# Altium PCB Boost_Conv_V1.0PCB.PcbDoc (part 1 of 3)
Units mm, origin at the board's own origin, x right, y up, seen from the top; angles counter-clockwise.
Board outline 213.5 x 150 mm, 2 copper layers (Top Layer, Bottom Layer); 53 components, 42 nets, 190 pads, 3434 vias.
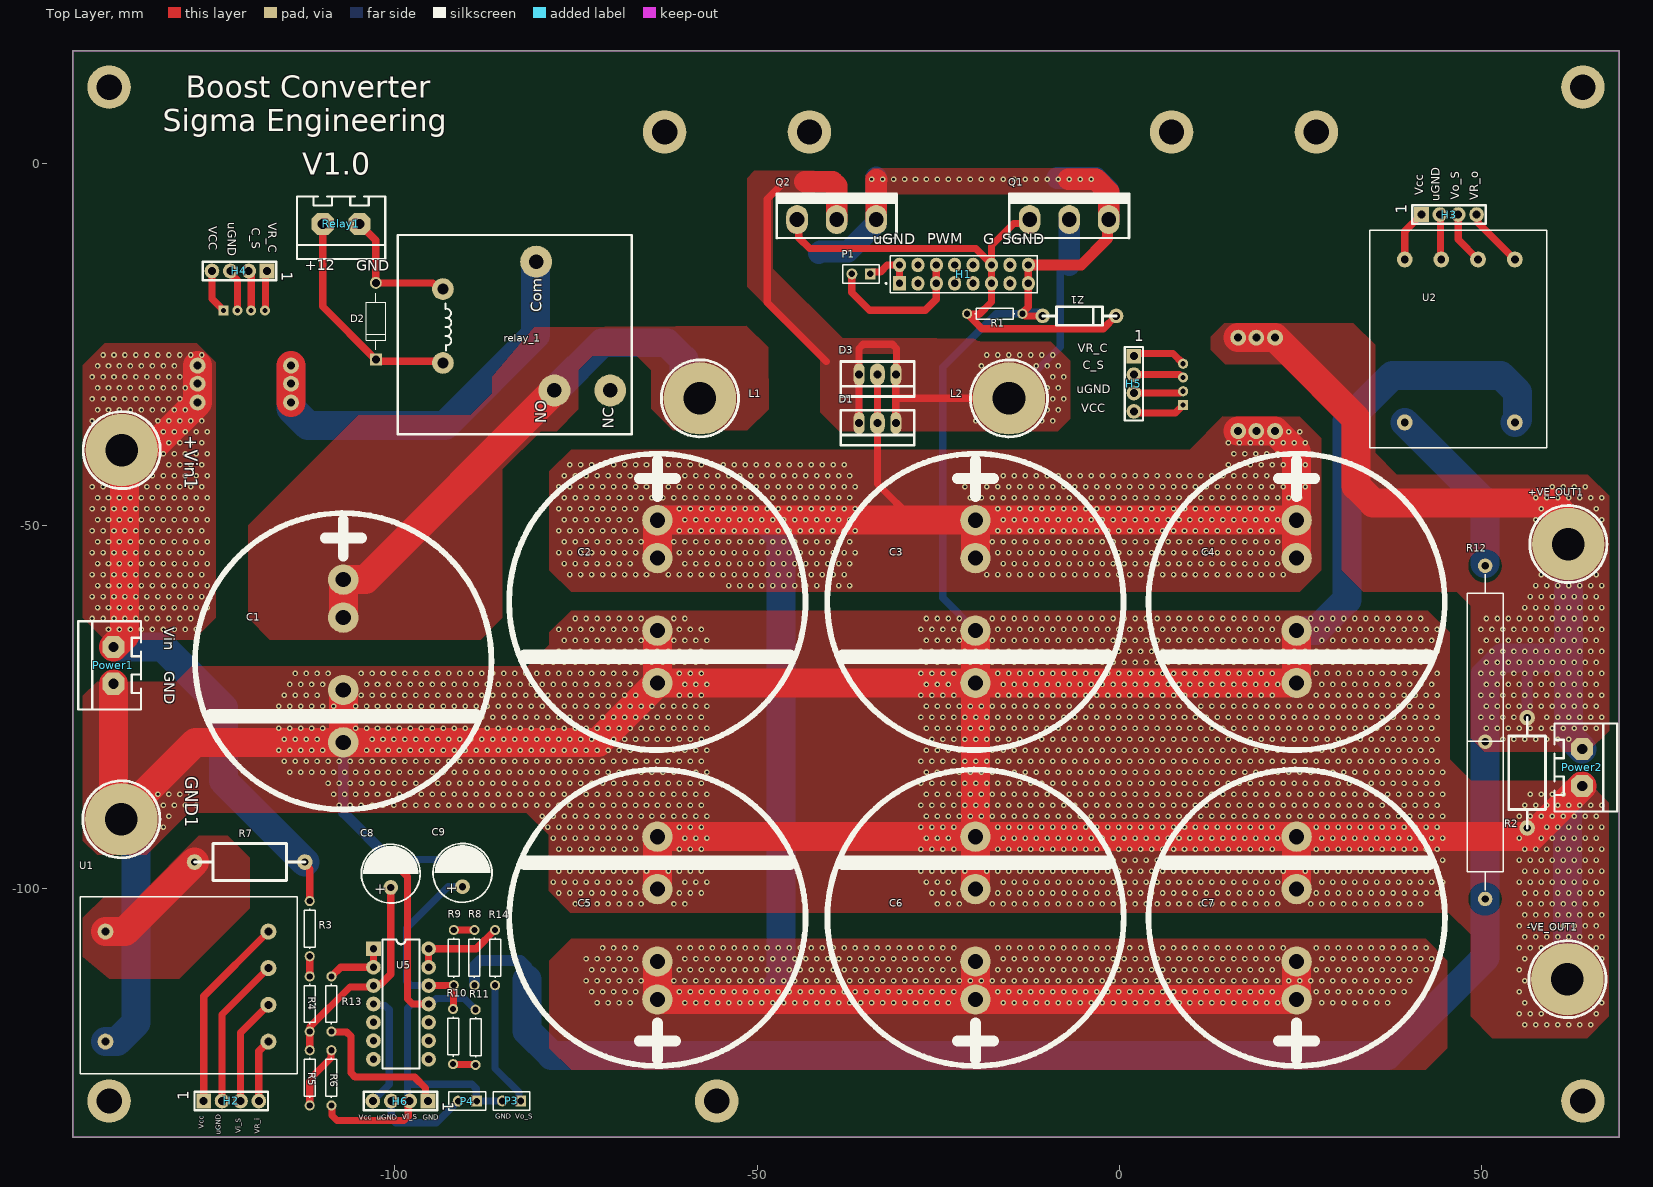
[diagram p0: Top Layer view]
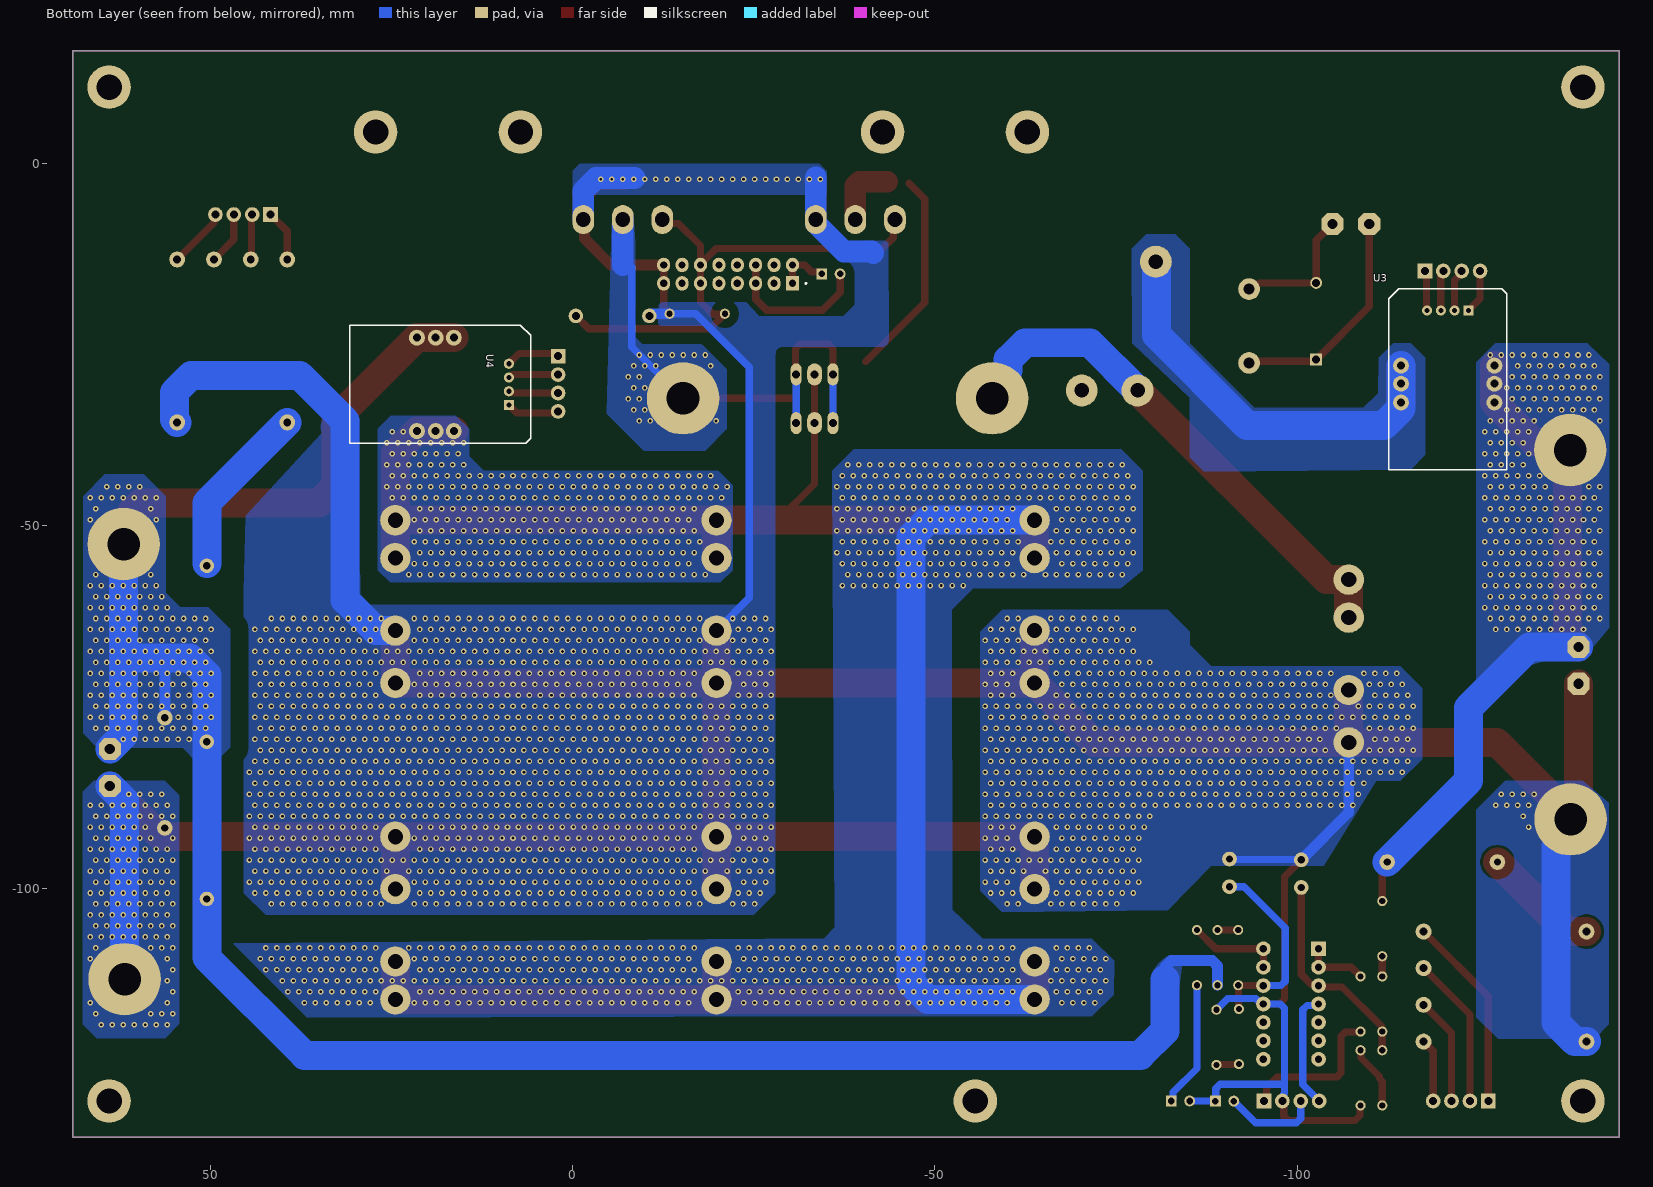
[diagram p1: Bottom Layer view, seen from below]

## Layer stack, top to bottom
Top Solder: solder mask 0.0102, Solder Resist, Dk 3.5
Top Layer: signal copper 0.0356
Dielectric 1: dielectric 0.32, FR-4, Dk 4.8
Bottom Layer: signal copper 0.0356
Bottom Solder: solder mask 0.0102, Solder Resist, Dk 3.5

## Board outline
-144.474,-134.403 69.026,-134.403 69.026,15.597 -144.474,15.597

## Design rules (kind name [scope] priority, off if disabled: settings)
Clearance [All] p1: gap=0.254 ignorepadtopadclearanceinfootprint=FALSE except(0: Arc-Hole Track-Hole SMDPad-Hole THPad-Hole Via-Hole Fill-Hole Poly-Hole Region-Hole Text-Hole; 0.08: Via-Via; 1.27: Track-Poly THPad-Poly; 2.54: Poly-Poly)
HoleSize [All] p1: absolutevalues=TRUE maxlimit=7 minlimit=0.025 maxpercent=80.000 minpercent=20.000
HoleToHoleClearance [All] p1: gap=0.1 allowstackedmicrovias=TRUE
MinimumSolderMaskSliver [All] p1: minsoldermaskwidth=0.01
PolygonConnect [All] p1: connectstyle=Direct reliefconductorwidth=0.254 reliefentries=4 polygonreliefangle="90 Angle" airgapwidth=0.254
RoutingVias [All] p1: holewidth=0.711 width=1.27 viastyle="Through Hole" minholewidth=0.1 minwidth=0.2 maxholewidth=3 maxwidth=6
SilkToSilkClearance [All] p1: silktosilkclearance=0
SilkToSolderMaskClearance [IsPad] p1: minsilkscreentomaskgap=0 clearancetoexposedcopper=TRUE
SolderMaskExpansion [All] p1: expansion=0.102 istentingtop=FALSE
Width [All] p1: maxlimit=5 minlimit=1 preferedwidth=4
25 further rules are at their usual default settings.

## Classes and differential pairs
component class Boost_Conv_V1.0_Sensing_Sch: C8 C9 H2 H3 H4 H5 H6 P3 P4 R3 R4 R5 R6 R7 R8 R9 R10 R11 R12 R13 R14 U1 U2 U3 U4 U5
component class Boost_Conv_V1.0_Power_Sch: +VE_OUT1 +Vin1 -VE_OUT1 C1 C2 C3 C4 C5 C6 C7 D1 D2 D3 GND1 L1 L2 Power1 Power2 Q2 R1 R2 Relay1 relay_1 Z1
component class Boost_Conv_V1.0_Control_Sch: H1 P1

## Components (designator, comment, footprint, x,y, rotation, side; value= is the part's Value field where it differs from the comment)
+VE_OUT1 "CON1" WIRE6MM 62.012,-52.503 r90 top
+Vin1 "CON1" WIRE6MM -137.725,-39.534 r90 top
-VE_OUT1 "CON1" WIRE6MM 61.885,-112.578 r90 top
C1 "Cap" ?#1 -107.136,-72.648 r90 top value="820 uF / 450 V"
C2 "Cap" ?#1 -63.766,-64.444 r90 top value="820 uF / 450 V"
C3 "Cap" ?#1 -19.849,-64.444 r90 top value="820 uF / 450 V"
C4 "Cap" ?#1 24.499,-64.444 r90 top value="820 uF / 450 V"
C5 "Cap" ?#1 -63.766,-100.14 r270 top value="820 uF / 450 V"
C6 "Cap" ?#1 -19.849,-100.14 r270 top value="820 uF / 450 V"
C7 "Cap" ?#1 24.499,-100.14 r270 top value="820 uF / 450 V"
C8 "CAP-DC" CAP-1.5 -100.574,-99.913 r90 top
C9 "CAP-DC" CAP-1.5 -90.674,-99.803 r90 top
D1 "Diode" TO220 -30.844,-35.8 r180 top value=FEP16
D2 "Diode" DIOAD1060W80L520D270 -102.647,-21.741 r90 top value=1N4007RL
D3 "Diode" TO220 -30.844,-29.069 r180 top value=FEP16
GND1 "CON1" WIRE6MM -137.774,-90.503 r90 top
H1 "H2*8" ?#2 -30.334,-16.503 r0 top
H2 "pin header 4p" SIP4 -126.414,-129.4 r0 top
H3 "pin header 4p" SIP4 41.726,-7.003 r0 top
H4 "pin header 4p" SIP4 -117.658,-14.795 r180 top
H5 "pin header 4p" SIP4 2.026,-26.563 r270 top
H6 "pin header 4p" SIP4 -95.434,-129.403 r180 top
L1 "CON1" WIRE6MM -57.895,-32.38 r0 top
L2 "CON1" WIRE6MM -15.223,-32.38 r0 top
P1 "Header 2" HDR1X2 -34.374,-15.203 r180 top
P3 "Header 2" HDR1X2 -82.634,-129.4 r180 top
P4 "Header 2" HDR1X2 -88.734,-129.403 r180 top
Power1 "Plugable_2Pin" TB2 -138.886,-71.792 r90 top
Power2 "Plugable_2Pin" TB2 63.926,-80.803 r270 top
Q1 "IGBT" TO247 -12.37,-7.698 r0 top value=IRGP4066
Q2 "IGBT" TO247 -44.475,-7.698 r0 top value=IRGP4066
R1 "Res1" AXIAL-0.3 -17.184,-20.703 r180 top value=2.2K
R2 "Res" R600 56.326,-91.703 r90 top value=10k/0.5w
R3 "Res1" AXIAL-0.3 -111.774,-105.603 r90 top value=200K
R4 "Res1" AXIAL-0.3 -111.774,-116.003 r90 top value=50K
R5 "Res1" AXIAL-0.3 -111.774,-126.203 r90 top value=20K
R6 "Res1" AXIAL-0.3 -108.774,-126.203 r90 top value=10K
R7 "2.5K / 0.25W" R600 -127.674,-96.403 r0 top
R8 "Res1" AXIAL-0.3 -89.024,-109.603 r270 top value=500K
R9 "Res1" AXIAL-0.3 -91.874,-109.603 r90 top value=100K
R10 "Res1" AXIAL-0.3 -91.974,-120.503 r90 top value=20K
R11 "Res1" AXIAL-0.3 -88.874,-120.603 r270 top value=10K
R12 "6K / 1W" R-VSENSE 50.526,-55.503 r270 top
R13 "Res1" AXIAL-0.3 -108.774,-116.003 r90 top value=0
R14 "Res1" AXIAL-0.3 -86.174,-109.603 r90 top value=0
Relay1 "Plugable_2Pin" TB2 -104.894,-8.303 r180 top
relay_1 "PreChgRelay" NT90TNCS12CB -67.306,-8.345 r180 top value=NT90THLCE12CB
U1 "VS" VSENSE -117.474,-121.203 r180 top
U2 "VS" VSENSE 54.626,-13.203 r270 top
U3 "JCT-TSRNP" JCT-TSRNP -123.656,-20.256 r270 bottom
U4 "JCT-TSRNP" JCT-TSRNP 8.826,-33.303 r0 bottom
U5 "MCP6004" DIP14 -102.974,-108.383 r0 top
Z1 "18 V / 0.5 W" D3 -0.414,-21.003 r0 top

## Footprints (in the part's own frame and the unit in brackets; to place one, negate y for a bottom-side part, rotate by r counter-clockwise, add the part's x,y. Pads: shape width x height; smd on the part's side, far side on the other; paste and mask are expansions set on the pad)
AXIAL-0.3 [mm] "Axial Device, Thru-Hole; 2 Leads; 0.3 in Pin Spacing"
  round 1.4 hole 0.85: 1(-3.81,0) 2(3.81,0)
  silkscreen extent -2.77,-0.76 2.77,0.76
CAP-1.5 [mil]
  round 80 hole 39.37: 1(0,0) 2(150,0)
  silkscreen extent -85,-160 235,160, body extent -93,-167 241,167, height 512
D3 [mil]
  round 79 hole 43.31: A(-400,0) K(0,0)
  silkscreen extent -400,-50 0,50, body extent -416,-50 16,56, height 189
DIOAD1060W80L520D270 [mm]
  round 1.65 hole 1.1: A(5.3,0)
  rect 1.65x1.65 hole 1.1: C(-5.3,0)
  silkscreen extent -3.9,-1.35 3.9,1.35, body extent -5.69,-1.36 5.69,1.36, height 2.72
DIP14 [mil]
  rect 80x80 hole 40: 1(0,0)
  round 80 hole 40: 2(0,-100) 3(0,-200) 4(0,-300) 5(0,-400) 6(0,-500) 7(0,-600) 8(300,-600) 9(300,-500) 10(300,-400) 11(300,-300) 12(300,-200) 13(300,-100) 14(300,0)
  silkscreen extent 50,-650 250,50
HDR1X2 [mm] "Connector; Header; 2 Position"
  rect 1.5x1.5 hole 0.9: 1(0,0)
  round 1.5 hole 0.9: 2(2.54,0)
  silkscreen extent -1.27,-1.27 3.81,1.27
JCT-TSRNP [mm]
  round 1.4 hole 0.7: GND(0,-1.9) OUT(0,-3.8) VR(0,-5.7)
  round 2.2 hole 1.1: IP+(7.6,3.6) IP+(10.1,3.6) IP+(12.7,3.6) IP-(7.6,-9.3) IP-(10.1,-9.3) IP-(12.7,-9.3)
  rect 1.4x1.4 hole 0.7: VCC(0,0)
  silkscreen extent -3,-11 22,5.3
NT90TNCS12CB [mm]
  round 3 hole 1.5: +(26.07,19.151) -(26.07,8.951)
  round 4.4 hole 2: COM(13.21,5.151) NC(2.97,22.951) NO(10.67,22.951)
  silkscreen extent 0,1.49 32.3,29
R600 [mil]
  round 85 hole 40: 1(0,0) 2(600,0)
  silkscreen extent 0,-100 600,100, body extent -41,-98 641,98, height 280
R-VSENSE [mm]
  round 2 hole 1: 1(0,0) 2(46,0)
  silkscreen extent 1.2,-2.5 44.8,2.5
SIP4 [mil]
  rect 80x80 hole 43.31: 1(0,0)
  round 80 hole 43.31: 2(100,0) 3(200,0) 4(300,0)
  silkscreen extent -50,-50 350,50, body extent -50,-45 350,55, height 334
TB2 [mil]
  oct 120x120 hole 55.12: 1(0,0) 2(200,0)
  silkscreen extent -139,-150 339,191
TO220 [mm]
  oval 1.5x3.048 hole 1.1: 1(0,0) 3(5.08,0)
  oval 2.032x3.048 hole 1.1: 2(2.54,0)
  silkscreen extent -2.54,-1.78 7.62,3.05, body extent -2.78,-1.7 7.87,3.1, height 16.96
TO247 [mm]
  oval 3x4 hole 2.032: 1(0,0) 2(5.461,0) 3(10.922,0)
  silkscreen extent -2.95,-2.69 13.87,3.71, body extent -2.46,-2.37 13.39,2.93, height 24.95
VSENSE [mm]
  round 2.2 hole 1.1: +(22.5,-15.2) -(22.5,0) uGND(0,-10.16) Vcc(0,-15.2) Vo(0,-5.08) VR(0,0)
  silkscreen extent -4,-20 26,4.4
WIRE6MM [mm]
  round 10 hole 4.5: 1(0,0)
  silkscreen extent -5.32,-5.32 5.32,5.31
?#1 [mm]
  round 4.2 hole 2.1: 1(10,0) 1(15.24,0) 2(-7.239,0) 2(0,0)
  silkscreen extent -16.5,-20.45 24.42,20.46, body extent -16.9,-20.9 24.9,20.9, height 40
?#2 [mm] "Connector; Header; 4x2 Position"
  rect 1.8x2 hole 1: 1(0,0)
  oval 1.8x2 hole 1: 1(0,2.54) 2(2.54,0) 2(2.54,2.54) 3(5.08,0) 3(5.08,2.54) 4(7.62,0) 4(7.62,2.54) 5(10.16,0) 5(10.16,2.54) 6(12.7,0) 6(12.7,2.54) 7(15.24,0) 7(15.24,2.54) 8(17.78,0) 8(17.78,2.54)
  silkscreen extent -1.95,-1.27 19.08,3.81, body extent -1.24,-1.27 19.08,3.73, height 8.6

## Part data
+VE_OUT1 +Vin1 -VE_OUT1 GND1 L1 L2: "Connector", SMD/TH=TH
C1 C2 C3 C4 C5 C6 C7: library part "CAPACITOR POL", "Electrolytic Capacitors", DPM/VM/AM="DPM, VM, AM", SMD/TH=TH
D1 D3 Q1 Q2: library part IRF540N, "N-Channel MOSFET", LatestRevisionDate=17-Jul-2002, LatestRevisionNote="Re-released for DXP Platform.", PackageDescription="TO, Flat Index; 3 In-Line, Axial Leads; Body Dia. 4.6mm; Lead Dia. 0.5 mm (max)", PackageReference=E3, PackageVersion=1995/1996, Published=8-Jun-2000, Publisher="Altium Limited"
D2: library part 1N4007RL, "Diode Standard 1000 V 1A Through Hole Axial", Package="DO-41-2 ON Semiconductor", Availability="In Stock", Check_prices=https://www.snapeda.com/parts/1N4007RL/Onsemi/view-part/?ref=eda, MF="ON Semiconductor", MP=1N4007RL, Price=None, Purchase-URL=https://pricing.snapeda.com/search/part/1N4007RL/?ref=eda, SnapEDA_Link=https://www.snapeda.com/parts/1N4007RL/Onsemi/view-part/?ref=snap
H1: library part "Header 8X2"
H2 H3 H4 H5 H6: Manufacturer="TE Connectivity AMP", Manufacturer Part Number=2355186-4, Supplier Part Number 1=17-2355186-4-ND, Pricing 1="1=0.84, 10=0.708, 100=0.6356, 500=0.52, 1000=0.46222, 5000=0.40444, 10000=0.38518 (USD)", Stock 1=5950, Supplier 1=Digi-Key
P1 P3 P4: "Header, 2-Pin", LatestRevisionDate=17-Jul-2002, LatestRevisionNote="Re-released for DXP Platform.", Publisher="Altium Limited"
Power1 Power2 Relay1: library part CON2, "Connector", SMD/TH=TH
R1 R3 R4 R5 R6 R8 R9 R10 R11 R13 R14: "Resistor", LatestRevisionDate=17-Jul-2002, LatestRevisionNote="Re-released for DXP Platform.", PackageDescription="Axial Device, Thru-Hole; 2 Leads; 0.3 in Pin Spacing", PackageReference=AXIAL-0.3, Published=8-Jun-2000, Publisher="Altium Limited"
R2 R7: library part Res1, "Resistor", SMD/TH=SMD
R12: library part R-VSENSE
relay_1: "NT90THLCE12CB"
U1 U2: library part Vsense-JCT-L25P3.3, "JCT-L25P3.3-voltage sensor"
U5: "Low Power Quad Operational Amplifier", note=SC, SMD/TH=SMD
Z1: library part Zener_Diode, "Zener diode", SMD/TH=SMD

## Free pads (board coordinates)
  round 6 hole 3.5: 2(-139.474,-129.4) 2(-139.474,10.597) 2(-62.774,4.393) 2(-55.574,-129.4) 2(-42.774,4.397) 2(7.229,4.393) 2(27.229,4.393) 2(64.026,-129.4) 2(64.026,10.597)

## Via types
v1: diameter 0.762, hole 0.381, Top Layer to Bottom Layer, 3433 vias
v2: diameter 2, hole 1, Top Layer to Bottom Layer, 1 vias

## Nets (pads, with @x,y where several pads share a name; then routed paths per layer and width w, separated by ;. In a path a pad name is that pad's centre, name@x,y a point inside that pad or via, vN(x,y) a via of type N, cw(c..) or ccw(c..) an arc to the next point about the centre after c; other vN are vias at no path point)
C_Sense_in: H4.2 U3.OUT | length 5.6
  Top Layer w1: H4.2@-120.198,-14.795 -120.198,-15.075 -119.856,-15.417 U3.OUT@-119.856,-20.256
C_Sense_out: H5.2 U4.OUT | length 7
  Top Layer w1: H5.2@2.026,-29.103 8.318,-29.103 8.718,-29.503 U4.OUT@8.826,-29.503
Cathode: C2.1 C3.1 C4.1 C5.1 C6.1 C7.1 D1.2 D3.2 U4.IP+ | length 346.4
  Top Layer w1: D3.2@-33.384,-29.069 D1.2@-33.384,-35.8 -33.384,-44.193 -28.373,-49.204
  Top Layer w4: C5.1@-63.766,-110.14 C5.1@-63.766,-115.38 C6.1@-19.849,-115.38 ; C2.1@-63.766,-54.444 C2.1@-63.766,-49.204 -28.373,-49.204 C3.1@-19.849,-49.204 ; C6.1@-19.849,-110.14 C6.1@-19.849,-115.38 ; C3.1@-19.849,-54.444 C3.1@-19.849,-49.204 ; U4.IP+@16.426,-36.903 U4.IP+@18.926,-36.903 U4.IP+@21.526,-36.903 24.499,-39.876 C4.1@24.499,-49.204 ; C7.1@24.499,-110.14 C7.1@24.499,-115.38 C6.1@-19.849,-115.38 ; C4.1@24.499,-54.444 C4.1@24.499,-49.204 ; C3.1@-19.849,-49.204 C4.1@24.499,-49.204
  Bottom Layer w4: C5.1@-63.766,-115.38 -49.017,-115.38 -46.674,-113.037 -46.674,-51.547 -49.017,-49.204 C2.1@-63.766,-49.204
  other v1: -72.092,-115.839 -70.576,-115.839 -69.06,-115.839 -67.544,-115.839 -59.964,-115.839 -58.448,-115.839 -56.932,-115.839 -55.416,-115.839 -53.9,-115.839 -52.384,-115.839 -50.868,-115.839 -49.352,-115.839 -47.836,-115.839 -46.32,-115.839 -44.804,-115.839 -43.288,-115.839 -41.772,-115.839 -40.256,-115.839 -38.74,-115.839 -37.224,-115.839 -35.708,-115.839 -34.192,-115.839 -32.676,-115.839 -31.16,-115.839 -29.644,-115.839 -28.128,-115.839 -26.612,-115.839 -25.096,-115.839 -23.58,-115.839 -16,-115.839 -14.484,-115.839 -12.968,-115.839 -11.452,-115.839 -9.936,-115.839 -8.42,-115.839 -6.904,-115.839 -5.388,-115.839 -3.872,-115.839 -2.356,-115.839 -0.84,-115.839 0.676,-115.839 2.192,-115.839 3.708,-115.839 5.224,-115.839 6.74,-115.839 8.256,-115.839 9.772,-115.839 11.288,-115.839 12.804,-115.839 14.32,-115.839 15.836,-115.839 17.352,-115.839 18.868,-115.839 20.384,-115.839 21.9,-115.839 27.964,-115.839 29.48,-115.839 30.996,-115.839 32.512,-115.839 34.028,-115.839 35.544,-115.839 37.06,-115.839 -72.85,-114.323 -71.334,-114.323 -69.818,-114.323 -68.302,-114.323 -66.786,-114.323 -60.722,-114.323 -59.206,-114.323 -57.69,-114.323 -56.174,-114.323 -54.658,-114.323 -53.142,-114.323 -51.626,-114.323 -50.11,-114.323 -48.594,-114.323 -47.078,-114.323 -45.562,-114.323 -44.046,-114.323 -42.53,-114.323 -41.014,-114.323 -39.498,-114.323 -37.982,-114.323 -36.466,-114.323 -34.95,-114.323 -33.434,-114.323 -31.918,-114.323 -30.402,-114.323 -28.886,-114.323 -27.37,-114.323 -25.854,-114.323 -24.338,-114.323 -22.822,-114.323 -16.758,-114.323 -15.242,-114.323 -13.726,-114.323 -12.21,-114.323 -10.694,-114.323 -9.178,-114.323 -7.662,-114.323 -6.146,-114.323 -4.63,-114.323 -3.114,-114.323 -1.598,-114.323 -0.082,-114.323 1.434,-114.323 2.95,-114.323 4.466,-114.323 5.982,-114.323 7.498,-114.323 9.014,-114.323 10.53,-114.323 12.046,-114.323 13.562,-114.323 15.078,-114.323 16.594,-114.323 18.11,-114.323 19.626,-114.323 21.142,-114.323 27.206,-114.323 28.722,-114.323 30.238,-114.323 31.754,-114.323 33.27,-114.323 34.786,-114.323 36.302,-114.323 37.818,-114.323 39.334,-114.323 -73.608,-112.807 -72.092,-112.807 -70.576,-112.807 -69.06,-112.807 -67.544,-112.807 -66.028,-112.807 -61.48,-112.807 -59.964,-112.807 -58.448,-112.807 -56.932,-112.807 -55.416,-112.807 -53.9,-112.807 -52.384,-112.807 -50.868,-112.807 -49.352,-112.807 -47.836,-112.807 -46.32,-112.807 -44.804,-112.807 -43.288,-112.807 -41.772,-112.807 -40.256,-112.807 -38.74,-112.807 -37.224,-112.807 -35.708,-112.807 -34.192,-112.807 -32.676,-112.807 -31.16,-112.807 -29.644,-112.807 -28.128,-112.807 -26.612,-112.807 -25.096,-112.807 -23.58,-112.807 -22.064,-112.807 -20.548,-112.807 -19.032,-112.807 -17.516,-112.807 -16,-112.807 -14.484,-112.807 -12.968,-112.807 -11.452,-112.807 -9.936,-112.807 -8.42,-112.807 -6.904,-112.807 -5.388,-112.807 -3.872,-112.807 -2.356,-112.807 -0.84,-112.807 0.676,-112.807 2.192,-112.807 3.708,-112.807 5.224,-112.807 6.74,-112.807 8.256,-112.807 9.772,-112.807 11.288,-112.807 12.804,-112.807 14.32,-112.807 15.836,-112.807 17.352,-112.807 18.868,-112.807 20.384,-112.807 21.9,-112.807 23.416,-112.807 24.932,-112.807 26.448,-112.807 27.964,-112.807 29.48,-112.807 30.996,-112.807 32.512,-112.807 34.028,-112.807 35.544,-112.807 37.06,-112.807 38.576,-112.807 40.092,-112.807 -72.85,-111.291 -71.334,-111.291 -69.818,-111.291 -68.302,-111.291 -66.786,-111.291 -60.722,-111.291 -59.206,-111.291 -57.69,-111.291 -56.174,-111.291 -54.658,-111.291 -53.142,-111.291 -51.626,-111.291 -50.11,-111.291 -48.594,-111.291 -47.078,-111.291 -45.562,-111.291 -44.046,-111.291 -42.53,-111.291 -41.014,-111.291 -39.498,-111.291 -37.982,-111.291 -36.466,-111.291 -34.95,-111.291 -33.434,-111.291 -31.918,-111.291 -30.402,-111.291 -28.886,-111.291 -27.37,-111.291 -25.854,-111.291 -24.338,-111.291 -22.822,-111.291 -16.758,-111.291 -15.242,-111.291 -13.726,-111.291 -12.21,-111.291 -10.694,-111.291 -9.178,-111.291 -7.662,-111.291 -6.146,-111.291 -4.63,-111.291 -3.114,-111.291 -1.598,-111.291 -0.082,-111.291 1.434,-111.291 2.95,-111.291 4.466,-111.291 5.982,-111.291 7.498,-111.291 9.014,-111.291 10.53,-111.291 12.046,-111.291 13.562,-111.291 15.078,-111.291 16.594,-111.291 18.11,-111.291 19.626,-111.291 21.142,-111.291 27.206,-111.291 28.722,-111.291 30.238,-111.291 31.754,-111.291 33.27,-111.291 34.786,-111.291 36.302,-111.291 37.818,-111.291 39.334,-111.291 40.85,-111.291 42.366,-111.291 -73.608,-109.775 -72.092,-109.775 -70.576,-109.775 -69.06,-109.775 -67.544,-109.775 -59.964,-109.775 -58.448,-109.775 -56.932,-109.775 -55.416,-109.775 -53.9,-109.775 -52.384,-109.775 -50.868,-109.775 -49.352,-109.775 -47.836,-109.775 -46.32,-109.775 -44.804,-109.775 -43.288,-109.775 -41.772,-109.775 -40.256,-109.775 -38.74,-109.775 -37.224,-109.775 -35.708,-109.775 -34.192,-109.775 -32.676,-109.775 -31.16,-109.775 -29.644,-109.775 -28.128,-109.775 -26.612,-109.775 -25.096,-109.775 -23.58,-109.775 -16,-109.775 -14.484,-109.775 -12.968,-109.775 -11.452,-109.775 -9.936,-109.775 -8.42,-109.775 -6.904,-109.775 -5.388,-109.775 -3.872,-109.775 -2.356,-109.775 -0.84,-109.775 0.676,-109.775 2.192,-109.775 3.708,-109.775 5.224,-109.775 6.74,-109.775 8.256,-109.775 9.772,-109.775 11.288,-109.775 12.804,-109.775 14.32,-109.775 15.836,-109.775 17.352,-109.775 18.868,-109.775 20.384,-109.775 21.9,-109.775 27.964,-109.775 29.48,-109.775 30.996,-109.775 32.512,-109.775 34.028,-109.775 35.544,-109.775 37.06,-109.775 38.576,-109.775 40.092,-109.775 41.608,-109.775 43.124,-109.775 -71.334,-108.259 -69.818,-108.259 -68.302,-108.259 -66.786,-108.259 -60.722,-108.259 -59.206,-108.259 -57.69,-108.259 -56.174,-108.259 -54.658,-108.259 -53.142,-108.259 -51.626,-108.259 -50.11,-108.259 -48.594,-108.259 -47.078,-108.259 -45.562,-108.259 -44.046,-108.259 -42.53,-108.259 -41.014,-108.259 -39.498,-108.259 -37.982,-108.259 -36.466,-108.259 -34.95,-108.259 -33.434,-108.259 -31.918,-108.259 -30.402,-108.259 -28.886,-108.259 -27.37,-108.259 -25.854,-108.259 -24.338,-108.259 -22.822,-108.259 -16.758,-108.259 -15.242,-108.259 -13.726,-108.259 -12.21,-108.259 -10.694,-108.259 -9.178,-108.259 -7.662,-108.259 -6.146,-108.259 -4.63,-108.259 -3.114,-108.259 -1.598,-108.259 -0.082,-108.259 1.434,-108.259 2.95,-108.259 4.466,-108.259 5.982,-108.259 7.498,-108.259 9.014,-108.259 10.53,-108.259 12.046,-108.259 13.562,-108.259 15.078,-108.259 16.594,-108.259 18.11,-108.259 19.626,-108.259 21.142,-108.259 22.658,-108.259 27.206,-108.259 28.722,-108.259 30.238,-108.259 31.754,-108.259 33.27,-108.259 34.786,-108.259 36.302,-108.259 37.818,-108.259 39.334,-108.259 40.85,-108.259 42.366,-108.259 -53.9,-58.231 -52.384,-58.231 -50.868,-58.231 -49.352,-58.231 -47.836,-58.231 -46.32,-58.231 -44.804,-58.231 -43.288,-58.231 -41.772,-58.231 -40.256,-58.231 -38.74,-58.231 -37.224,-58.231 -75.882,-56.715 -74.366,-56.715 -72.85,-56.715 -71.334,-56.715 -69.818,-56.715 -68.302,-56.715 -66.786,-56.715 -65.27,-56.715 -62.238,-56.715 -60.722,-56.715 -59.206,-56.715 -57.69,-56.715 -56.174,-56.715 -54.658,-56.715 -53.142,-56.715 -51.626,-56.715 -50.11,-56.715 -48.594,-56.715 -47.078,-56.715 -45.562,-56.715 -44.046,-56.715 -42.53,-56.715 -41.014,-56.715 -39.498,-56.715 -37.982,-56.715 -18.274,-56.715 -16.758,-56.715 -15.242,-56.715 -13.726,-56.715 -12.21,-56.715 -10.694,-56.715 -9.178,-56.715 -7.662,-56.715 -6.146,-56.715 -4.63,-56.715 -3.114,-56.715 -1.598,-56.715 -0.082,-56.715 1.434,-56.715 2.95,-56.715 4.466,-56.715 5.982,-56.715 7.498,-56.715 9.014,-56.715 10.53,-56.715 12.046,-56.715 13.562,-56.715 15.078,-56.715 16.594,-56.715 18.11,-56.715 19.626,-56.715 21.142,-56.715 22.658,-56.715 -76.64,-55.199 -75.124,-55.199 -73.608,-55.199 -72.092,-55.199 -70.576,-55.199 -69.06,-55.199 -67.544,-55.199 -59.964,-55.199 -58.448,-55.199 -56.932,-55.199 -55.416,-55.199 -53.9,-55.199 -52.384,-55.199 -50.868,-55.199 -49.352,-55.199 -47.836,-55.199 -46.32,-55.199 -44.804,-55.199 -43.288,-55.199 -41.772,-55.199 -40.256,-55.199 -38.74,-55.199 -37.224,-55.199 -16,-55.199 -14.484,-55.199 -12.968,-55.199 -11.452,-55.199 -9.936,-55.199 -8.42,-55.199 -6.904,-55.199 -5.388,-55.199 -3.872,-55.199 -2.356,-55.199 -0.84,-55.199 0.676,-55.199 2.192,-55.199 3.708,-55.199 5.224,-55.199 6.74,-55.199 8.256,-55.199 9.772,-55.199 11.288,-55.199 12.804,-55.199 14.32,-55.199 15.836,-55.199 17.352,-55.199 18.868,-55.199 20.384,-55.199 21.9,-55.199 -77.398,-53.683 -75.882,-53.683 -74.366,-53.683 -72.85,-53.683 -71.334,-53.683 -69.818,-53.683 -68.302,-53.683 -66.786,-53.683 -60.722,-53.683 -59.206,-53.683 -57.69,-53.683 -56.174,-53.683 -54.658,-53.683 -53.142,-53.683 -51.626,-53.683 -50.11,-53.683 -48.594,-53.683 -47.078,-53.683 -45.562,-53.683 -44.046,-53.683 -42.53,-53.683 -41.014,-53.683 -39.498,-53.683 -37.982,-53.683 -36.466,-53.683 -16.758,-53.683 -15.242,-53.683 -13.726,-53.683 -12.21,-53.683 -10.694,-53.683 -9.178,-53.683 -7.662,-53.683 -6.146,-53.683 -4.63,-53.683 -3.114,-53.683 -1.598,-53.683 -0.082,-53.683 1.434,-53.683 2.95,-53.683 4.466,-53.683 5.982,-53.683 7.498,-53.683 9.014,-53.683 10.53,-53.683 12.046,-53.683 13.562,-53.683 15.078,-53.683 16.594,-53.683 18.11,-53.683 19.626,-53.683 21.142,-53.683 -76.64,-52.167 -75.124,-52.167 -73.608,-52.167 -72.092,-52.167 -70.576,-52.167 -69.06,-52.167 -67.544,-52.167 -66.028,-52.167 -61.48,-52.167 -59.964,-52.167 -58.448,-52.167 -56.932,-52.167 -55.416,-52.167 -53.9,-52.167 -52.384,-52.167 -50.868,-52.167 -49.352,-52.167 -47.836,-52.167 -46.32,-52.167 -44.804,-52.167 -43.288,-52.167 -41.772,-52.167 -40.256,-52.167 -38.74,-52.167 -37.224,-52.167 -17.516,-52.167 -16,-52.167 -14.484,-52.167 -12.968,-52.167 -11.452,-52.167 -9.936,-52.167 -8.42,-52.167 -6.904,-52.167 -5.388,-52.167 -3.872,-52.167 -2.356,-52.167 -0.84,-52.167 0.676,-52.167 2.192,-52.167 3.708,-52.167 5.224,-52.167 6.74,-52.167 8.256,-52.167 9.772,-52.167 11.288,-52.167 12.804,-52.167 14.32,-52.167 15.836,-52.167 17.352,-52.167 18.868,-52.167 20.384,-52.167 21.9,-52.167 -77.398,-50.651 -75.882,-50.651 -74.366,-50.651 -72.85,-50.651 -71.334,-50.651 -69.818,-50.651 -68.302,-50.651 -66.786,-50.651 -60.722,-50.651 -59.206,-50.651 -57.69,-50.651 -56.174,-50.651 -54.658,-50.651 -53.142,-50.651 -51.626,-50.651 -50.11,-50.651 -48.594,-50.651 -47.078,-50.651 -45.562,-50.651 -44.046,-50.651 -42.53,-50.651 -41.014,-50.651 -39.498,-50.651 -37.982,-50.651 -36.466,-50.651 -16.758,-50.651 -15.242,-50.651 -13.726,-50.651 -12.21,-50.651 -10.694,-50.651 -9.178,-50.651 -7.662,-50.651 -6.146,-50.651 -4.63,-50.651 -3.114,-50.651 -1.598,-50.651 -0.082,-50.651 1.434,-50.651 2.95,-50.651 4.466,-50.651 5.982,-50.651 7.498,-50.651 9.014,-50.651 10.53,-50.651 12.046,-50.651 13.562,-50.651 15.078,-50.651 16.594,-50.651 18.11,-50.651 19.626,-50.651 21.142,-50.651 -76.64,-49.135 -75.124,-49.135 -73.608,-49.135 -72.092,-49.135 -70.576,-49.135 -69.06,-49.135 -67.544,-49.135 -59.964,-49.135 -58.448,-49.135 -56.932,-49.135 -55.416,-49.135 -53.9,-49.135 -52.384,-49.135 -50.868,-49.135 -49.352,-49.135 -47.836,-49.135 -46.32,-49.135 -44.804,-49.135 -43.288,-49.135 -41.772,-49.135 -40.256,-49.135 -38.74,-49.135 -37.224,-49.135 -16,-49.135 -14.484,-49.135 -12.968,-49.135 -11.452,-49.135 -9.936,-49.135 -8.42,-49.135 -6.904,-49.135 -5.388,-49.135 -3.872,-49.135 -2.356,-49.135 -0.84,-49.135 0.676,-49.135 2.192,-49.135 3.708,-49.135 5.224,-49.135 6.74,-49.135 8.256,-49.135 9.772,-49.135 11.288,-49.135 12.804,-49.135 14.32,-49.135 15.836,-49.135 17.352,-49.135 18.868,-49.135 20.384,-49.135 21.9,-49.135 -77.398,-47.619 -75.882,-47.619 -74.366,-47.619 -72.85,-47.619 -71.334,-47.619 -69.818,-47.619 -68.302,-47.619 -66.786,-47.619 -60.722,-47.619 -59.206,-47.619 -57.69,-47.619 -56.174,-47.619 -54.658,-47.619 -53.142,-47.619 -51.626,-47.619 -50.11,-47.619 -48.594,-47.619 -47.078,-47.619 -45.562,-47.619 -44.046,-47.619 -42.53,-47.619 -41.014,-47.619 -39.498,-47.619 -37.982,-47.619 -36.466,-47.619 -16.758,-47.619 -15.242,-47.619 -13.726,-47.619 -12.21,-47.619 -10.694,-47.619 -9.178,-47.619 -7.662,-47.619 -6.146,-47.619 -4.63,-47.619 -3.114,-47.619 -1.598,-47.619 -0.082,-47.619 1.434,-47.619 2.95,-47.619 4.466,-47.619 5.982,-47.619 7.498,-47.619 9.014,-47.619 10.53,-47.619 12.046,-47.619 13.562,-47.619 15.078,-47.619 16.594,-47.619 18.11,-47.619 19.626,-47.619 21.142,-47.619 -76.64,-46.103 -75.124,-46.103 -73.608,-46.103 -72.092,-46.103 -70.576,-46.103 -69.06,-46.103 -67.544,-46.103 -66.028,-46.103 -64.512,-46.103 -62.996,-46.103 -61.48,-46.103 -59.964,-46.103 -58.448,-46.103 -56.932,-46.103 -55.416,-46.103 -53.9,-46.103 -52.384,-46.103 -50.868,-46.103 -49.352,-46.103 -47.836,-46.103 -46.32,-46.103 -44.804,-46.103 -43.288,-46.103 -41.772,-46.103 -40.256,-46.103 -38.74,-46.103 -37.224,-46.103 -20.548,-46.103 -19.032,-46.103 -17.516,-46.103 -16,-46.103 -14.484,-46.103 -12.968,-46.103 -11.452,-46.103 -9.936,-46.103 -8.42,-46.103 -6.904,-46.103 -5.388,-46.103 -3.872,-46.103 -2.356,-46.103 -0.84,-46.103 0.676,-46.103 2.192,-46.103 3.708,-46.103 5.224,-46.103 6.74,-46.103 8.256,-46.103 9.772,-46.103 11.288,-46.103 12.804,-46.103 14.32,-46.103 15.836,-46.103 17.352,-46.103 18.868,-46.103 20.384,-46.103 21.9,-46.103 23.416,-46.103 24.932,-46.103 -77.398,-44.587 -75.882,-44.587 -74.366,-44.587 -72.85,-44.587 -71.334,-44.587 -69.818,-44.587 -68.302,-44.587 -66.786,-44.587 -65.27,-44.587 -63.754,-44.587 -62.238,-44.587 -60.722,-44.587 -59.206,-44.587 -57.69,-44.587 -56.174,-44.587 -54.658,-44.587 -53.142,-44.587 -51.626,-44.587 -50.11,-44.587 -48.594,-44.587 -47.078,-44.587 -45.562,-44.587 -44.046,-44.587 -42.53,-44.587 -41.014,-44.587 -39.498,-44.587 -37.982,-44.587 -36.466,-44.587 -21.306,-44.587 -19.79,-44.587 -18.274,-44.587 -16.758,-44.587 -15.242,-44.587 -13.726,-44.587 -12.21,-44.587 -10.694,-44.587 -9.178,-44.587 -7.662,-44.587 -6.146,-44.587 -4.63,-44.587 -3.114,-44.587 -1.598,-44.587 -0.082,-44.587 1.434,-44.587 2.95,-44.587 4.466,-44.587 5.982,-44.587 7.498,-44.587 9.014,-44.587 10.53,-44.587 12.046,-44.587 13.562,-44.587 15.078,-44.587 16.594,-44.587 18.11,-44.587 19.626,-44.587 21.142,-44.587 22.658,-44.587 24.174,-44.587 25.69,-44.587 -76.64,-43.071 -75.124,-43.071 -73.608,-43.071 -72.092,-43.071 -70.576,-43.071 -69.06,-43.071 -67.544,-43.071 -66.028,-43.071 -64.512,-43.071 -62.996,-43.071 -61.48,-43.071 -59.964,-43.071 -58.448,-43.071 -56.932,-43.071 -55.416,-43.071 -53.9,-43.071 -52.384,-43.071 -50.868,-43.071 -49.352,-43.071 -47.836,-43.071 -46.32,-43.071 -44.804,-43.071 -43.288,-43.071 -41.772,-43.071 -40.256,-43.071 -38.74,-43.071 -37.224,-43.071 -19.032,-43.071 -17.516,-43.071 -16,-43.071 -14.484,-43.071 -12.968,-43.071 -11.452,-43.071 -9.936,-43.071 -8.42,-43.071 -6.904,-43.071 -5.388,-43.071 -3.872,-43.071 -2.356,-43.071 -0.84,-43.071 0.676,-43.071 2.192,-43.071 3.708,-43.071 5.224,-43.071 6.74,-43.071 8.256,-43.071 9.772,-43.071 11.288,-43.071 12.804,-43.071 14.32,-43.071 15.836,-43.071 17.352,-43.071 18.868,-43.071 20.384,-43.071 21.9,-43.071 23.416,-43.071 24.932,-43.071 -75.882,-41.555 -74.366,-41.555 -72.85,-41.555 -71.334,-41.555 -69.818,-41.555 -68.302,-41.555 -66.786,-41.555 -65.27,-41.555 -63.754,-41.555 -62.238,-41.555 -60.722,-41.555 -59.206,-41.555 -57.69,-41.555 -56.174,-41.555 -54.658,-41.555 -53.142,-41.555 -51.626,-41.555 -50.11,-41.555 -48.594,-41.555 -47.078,-41.555 -45.562,-41.555 -44.046,-41.555 -42.53,-41.555 -41.014,-41.555 -39.498,-41.555 -37.982,-41.555 15.078,-41.555 16.594,-41.555 18.11,-41.555 19.626,-41.555 21.142,-41.555 22.658,-41.555 24.174,-41.555 25.69,-41.555 15.836,-40.039 17.352,-40.039 18.868,-40.039 20.384,-40.039 21.9,-40.039 23.416,-40.039 24.932,-40.039 15.078,-38.523 16.594,-38.523 18.11,-38.523 19.626,-38.523 21.142,-38.523 22.658,-38.523 24.174,-38.523 25.69,-38.523 23.416,-37.008 24.932,-37.008
Collector: D1.1 D1.3 D3.1 D3.3 L2.1 Q1.2 Q2.2 | length 122.9
  Top Layer w1: -46.421,-2.695 -48.59,-4.864 -48.59,-19.145 -40.444,-27.292 ; D1.3@-35.924,-35.8 D3.3@-35.924,-29.069 -35.924,-25.489 -35.338,-24.903 -31.334,-24.903 -30.748,-25.489 -30.748,-28.974 D3.1@-30.844,-29.069 -30.844,-32.38 ; D1.1@-30.844,-35.8 -30.844,-32.38 ; L2.1@-15.223,-32.38 -30.844,-32.38
  Top Layer w3: -43.383,-2.465 -39.6,-2.465 -39.014,-3.051 Q2.2@-39.014,-7.698
  Bottom Layer w1: D1.3@-35.924,-35.8 D3.3@-35.924,-29.069 D3.3@-35.924,-28.295 ; D1.1@-30.844,-35.8 D3.1@-30.844,-29.069 ; L2.1@-15.223,-32.38 -8.134,-25.291 -8.134,-14.249 -6.909,-13.97
  Bottom Layer w3: -6.909,-13.97 Q1.2@-6.909,-7.698
  other v1: -19.79,-35.492 -10.694,-35.492 -9.178,-35.492 -9.936,-33.976 -8.42,-33.976 -9.178,-32.46 -7.662,-32.46 -9.936,-30.944 -8.42,-30.944 -9.178,-29.428 -7.662,-29.428 -19.032,-27.912 -11.452,-27.912 -9.936,-27.912 -8.42,-27.912 -18.274,-26.396 -16.758,-26.396 -15.242,-26.396 -13.726,-26.396 -12.21,-26.396 -10.694,-26.396 -9.178,-26.396